# Altium PCB River Level Sensor Datalogger.PcbDoc
Units mm, origin at the board's own origin, x right, y up, seen from the top; angles counter-clockwise.
Board outline 74.09 x 59.44 mm, 2 copper layers (Top Layer, Bottom Layer); 26 components, 21 nets, 115 pads, 15 vias.
Unrouted connection lines stored in the file: 3.
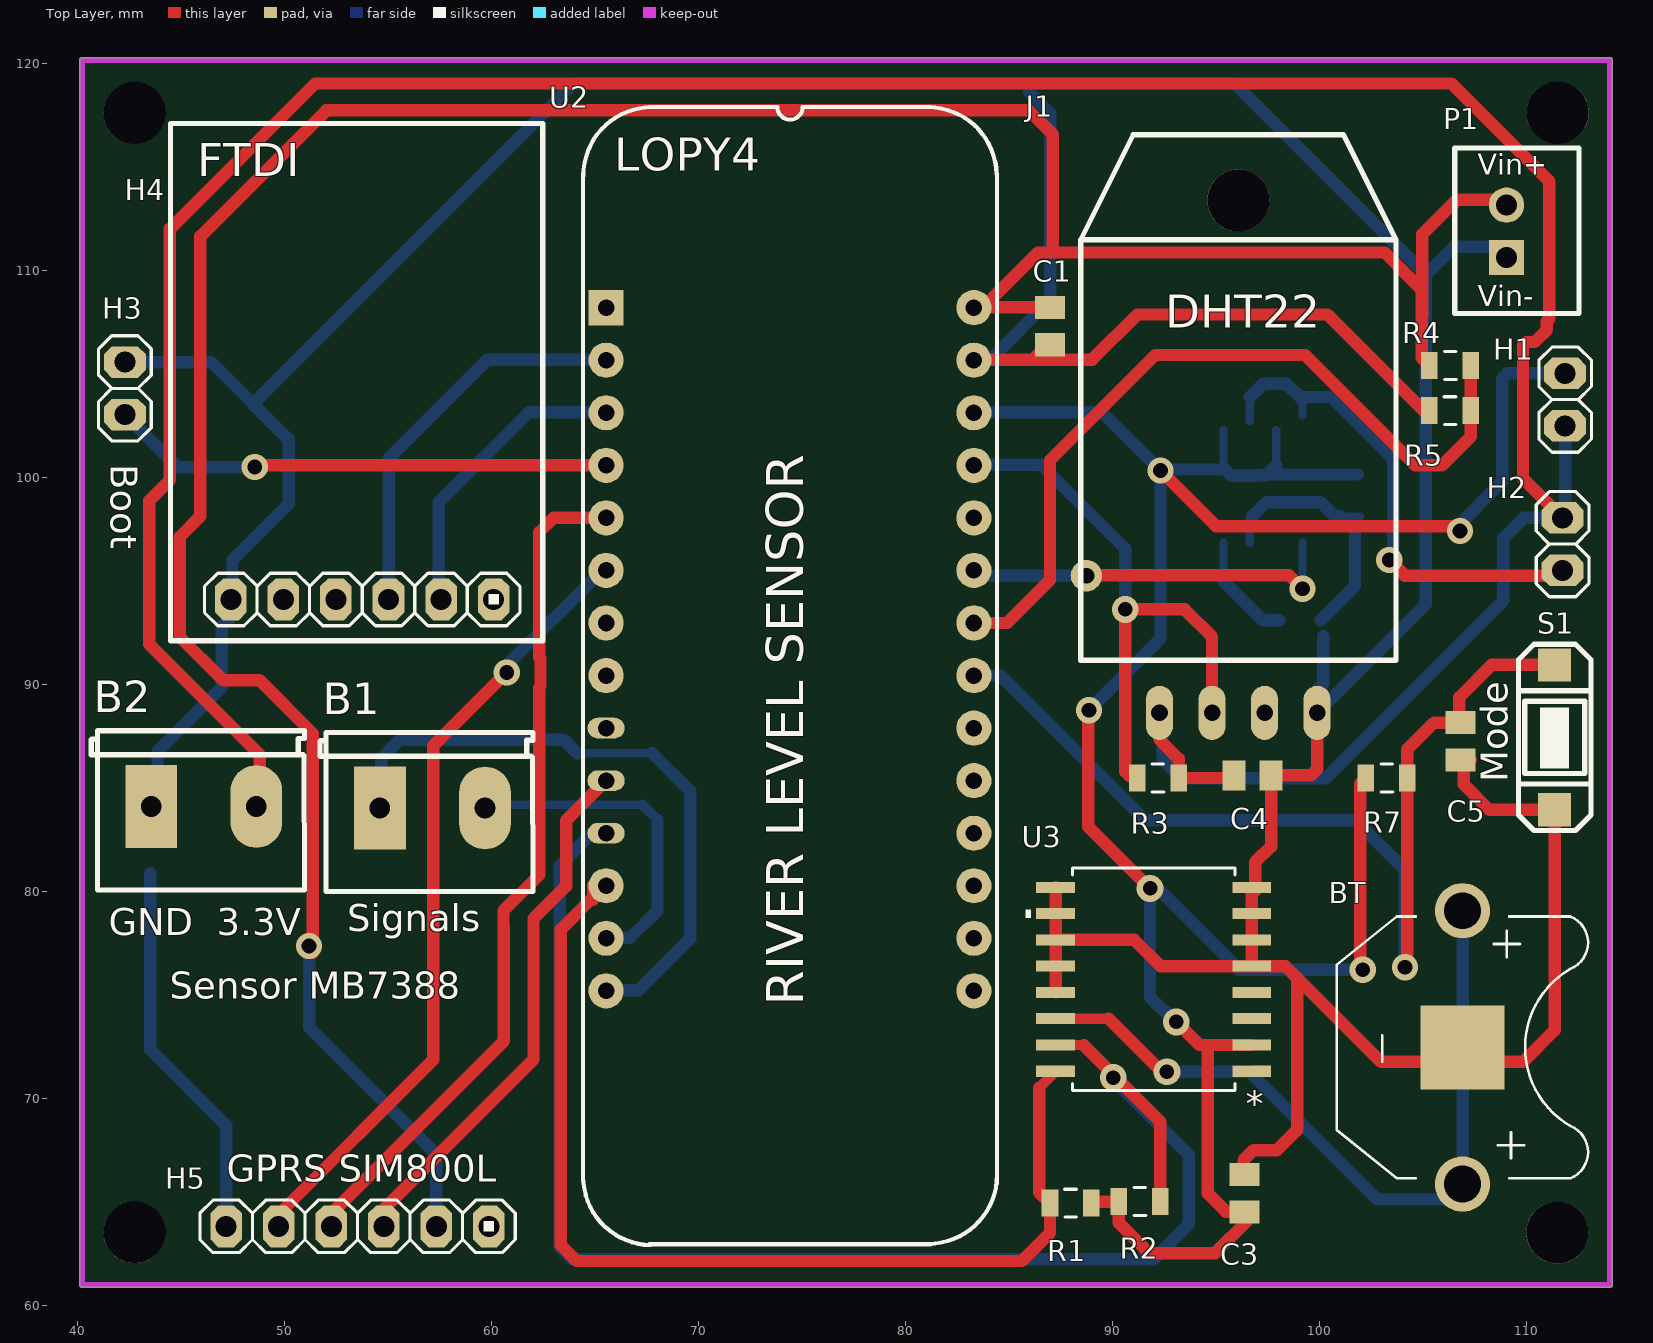
[diagram p0: Top Layer view]
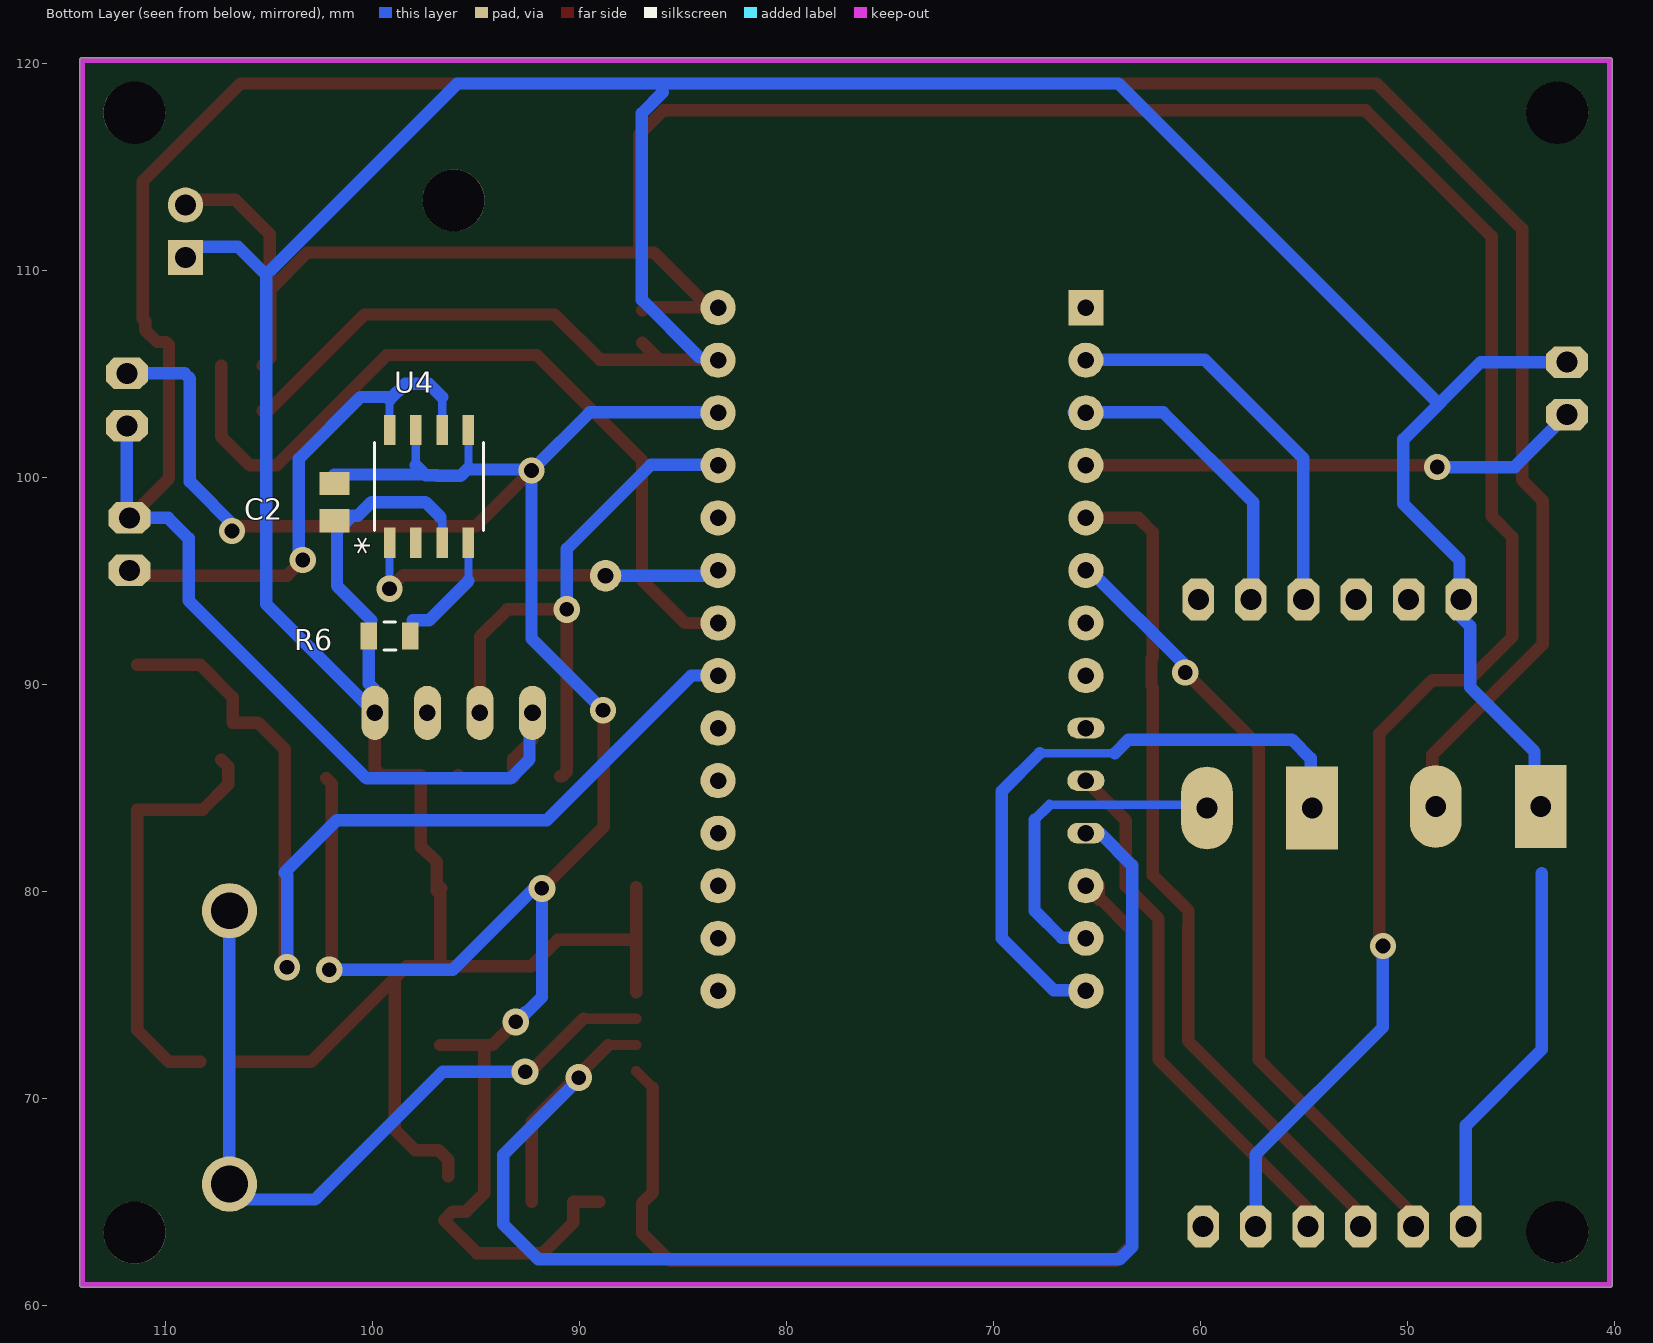
[diagram p1: Bottom Layer view, seen from below]

## Layer stack, top to bottom
Top Solder: solder mask 0.0102, Solder Resist, Dk 3.5
Top Layer: signal copper 0.0356
Dielectric 1: dielectric 0.32, FR-4, Dk 4.8
Bottom Layer: signal copper 0.0356
Bottom Solder: solder mask 0.0102, Solder Resist, Dk 3.5

## Board outline
40.208,60.858 cw(c40.208,60.985) 40.081,60.985 40.081,120.167 cw(c40.208,120.167) 40.208,120.295 114.046,120.295 cw(c114.046,120.167) 114.173,120.167 114.173,60.985 cw(c114.046,60.985) 114.046,60.858

## Design rules (kind name [scope] priority, off if disabled: settings)
Clearance [All] p1: gap=0.7
PolygonConnect [All] p1: connectstyle=Relief reliefconductorwidth=0.254 reliefentries=4 polygonreliefangle="90 Angle" airgapwidth=0.254
RoutingVias [All] p1: holewidth=0.711 width=1.27 viastyle="Through Hole" minholewidth=0.711 minwidth=1.27 maxholewidth=0.711 maxwidth=1.27
SolderMaskExpansion [All] p1: expansion=0.102
Width [All] p1: maxlimit=0.7 minlimit=0.4 preferedwidth=0.6 minimp=50.000000 maximp=50.000000 favimp=50.000000
30 further rules are at their usual default settings.

## Components (designator, comment, footprint, x,y, rotation, side; value= is the part's Value field where it differs from the comment)
B1 "Borne" BORNE2 57.1,84.05 r0 top
B2 "Borne" BORNE2 46.05,84.125 r0 top
BT "BK-5091" BAT_BK-5091 106.925,72.45 r270 top
C1 "08055C104KAT2A" CAP_X7R_0805_AVX 86.995,107.315 r90 top
C2 "08055C104KAT2A" CAP_X7R_0805_AVX 101.854,98.806 r90 bottom
C3 "08055C104KAT2A" CAP_X7R_0805_AVX 96.393,65.405 r270 top
C4 "08055C104KAT2A" CAP_X7R_0805_AVX 96.774,85.598 r180 top
C5 "08055C104KAT2A" CAP_X7R_0805_AVX 106.825,87.25 r90 top
H1 "Header" "Header 1X2" 111.887,105.029 r270 top
H2 "Header" "Header 1X2" 111.76,95.504 r90 top
H3 "Header" "Header 1X2" 42.275,105.575 r270 top
H4 "sparkfunFTDI" sparkfunFTDI 52.475,94.1 r0 top
H5 "Header 6" "Header 1X6" 52.25,63.8 r0 top
J1 "DHT22" DHT22 96.088,88.621 r0 top
P1 "Header 2" BORNERA25-2 109.05,110.625 r90 top
R1 "Res1" 0805 87.986,64.922 r180 top
R2 "Res2" 0805 91.313,64.999 r0 top
R3 "Res3" 0805 92.202,85.471 r0 top
R4 "Res4" 0805 106.324,105.41 r0 top
R5 "Res5" 0805 106.324,103.226 r180 top
R6 "" 0805 99.187,92.329 r180 bottom
R7 "Res1" 0805 103.251,85.471 r0 top
S1 "SW-PB" BUTTON-1-SMD 111.379,91.186 r0 top
U2 "LoPy4" LoPy 74.422,91.694 r270 top
U3 "ds3231s#" 21-0042B_16_MXM 91.999,75.743 r180 top
U4 "MIC2545A-2YM-TR" SOP-8_MCH 97.282,99.568 r90 bottom

## Footprints (in the part's own frame and the unit in brackets; to place one, negate y for a bottom-side part, rotate by r counter-clockwise, add the part's x,y. Pads: shape width x height; smd on the part's side, far side on the other; paste and mask are expansions set on the pad)
21-0042B_16_MXM [mil]
  rect 74x21 smd paste+0 mask+0: 1(-186.5,175) 2(-186.5,125) 3(-186.5,75) 4(-186.5,25) 5(-186.5,-25) 6(-186.5,-75) 7(-186.5,-125) 8(-186.5,-175) 9(186.5,-175) 10(186.5,-125) 11(186.5,-75) 12(186.5,-25) 13(186.5,25) 14(186.5,75) 15(186.5,125) 16(186.5,175)
  silkscreen extent -155,-212 244,212, body extent -209,-210 209,203, height 104
0805 [mm] "Chip Resistor, Empaque 0805"
  rect 0.8x1.3 smd: 1(-1,0) 2(1,0)
  silkscreen extent -0.27,-0.67 0.3,0.67, body extent -1,-0.63 1,0.62, height 0.78
BAT_BK-5091 [mm]
  round 2.67 hole 1.78: 1+(-6.605,0) 2+(6.605,0)
  rect 4.06x4.06 smd: NEG(0,0)
  silkscreen extent -6.33,-6.07 6.33,6.07, body extent -9.63,-6.99 9.37,5.59, height 3.22
BORNE2 [mm] "Terminal atornillable 2 salidas"
  rect 2.5x4 hole 1: 1(-2.501,-0.028)
  oval 2.5x4 hole 1: 2(2.579,-0.028)
  silkscreen extent -5.4,-4.06 4.9,3.62, body extent -5.51,-3.97 4.99,3.73, height 10
BORNERA25-2 [mm]
  rect 1.7x1.7 hole 1: 1(0,0)
  round 1.7 hole 1: 2(2.54,0)
  silkscreen extent -2.7,-3.5 5.3,2.5, body extent -1.29,-3.22 3.79,2.62, height 10.1
BUTTON-1-SMD [mm]
  rect 1.6x1.6 smd: 1(0,-0.25) 2(0,-7.25)
  silkscreen extent -1.75,-8.25 1.75,0.75, body extent -1.8,-7.75 1.8,0.25, height 2.5
CAP_X7R_0805_AVX [mil]
  rect 44x57 smd paste+0 mask+0: 1(-35.5,0) 2(35.5,0)
  body extent -44,-29 44,29, height 37
DHT22 [mm]
  oval 1.308x2.616 hole 0.8: DATA(-1.27,0) GND(3.81,0) NC(1.27,0) VDD(-3.81,0)
  round 3 hole 3 unplated: ""(0,24.765)
  silkscreen extent -7.62,2.54 7.62,27.94, body extent -7.73,-0.57 7.37,29.78, height 7.73
"Header 1X2" [mil] "Conector Header 1 linea 2 terminales"
  oct 60x80 hole 40: 1(0,0) 2(100,0)
  silkscreen extent -50,-50 150,50, body extent -50,-49 150,49, height 341
"Header 1X6" [mil] "Conector Header 1 linea 6 terminales"
  oct 60x80 hole 40: 1(-200,0) 2(-100,0) 3(0,0) 4(100,0) 5(200,0) 6(300,0)
  silkscreen extent -250,-50 350,50, body extent -250,-48 350,50, height 344
LoPy [mm] "DIP, Plastic; 28 Leads; Row Spacing 15.24 mm; Pitch 2.54 mm"
  rect 1.7x1.7 hole 0.8: 1(-16.51,-8.89)
  round 1.7 hole 0.8: 2(-13.97,-8.89) 3(-11.43,-8.89) 4(-8.89,-8.89) 5(-6.35,-8.89) 6(-3.81,-8.89) 7(-1.27,-8.89) 8(1.27,-8.89) 12(11.43,-8.89) 13(13.97,-8.89) 14(16.51,-8.89) 15(16.51,8.89) 16(13.97,8.89) 17(11.43,8.89) 18(8.89,8.89) 19(6.35,8.89) 20(3.81,8.89) 21(1.27,8.89) 22(-1.27,8.89) 23(-3.81,8.89) 24(-6.35,8.89) 25(-8.89,8.89) 26(-11.43,8.89) 27(-13.97,8.89) 28(-16.51,8.89)
  oval 1x1.8 hole 0.8: 9(3.81,-8.89) 10(6.35,-8.89) 11(8.89,-8.89)
  silkscreen extent -26.21,-10 28.8,10, body extent -26.61,-10.03 28.64,10.29, height 6.2
SOP-8_MCH [mil]
  rect 57.5x22 smd paste+0 mask+0: 1(-107.25,75) 2(-107.25,25) 3(-107.25,-25) 4(-107.25,-75) 5(107.25,-75) 6(107.25,-25) 7(107.25,25) 8(107.25,75)
  silkscreen extent -84,-104 84,104, body extent -117,-99 127,99, height 69
sparkfunFTDI [mil] "Conector Header 1 linea 6 terminales"
  oct 60x80 hole 40: 1(-200,0) 2(-100,0) 3(0,0) 4(100,0) 5(200,0) 6(300,0)
  silkscreen extent -315,-79 394,906, body extent -310,39 394,1001, height 306

## Part data
B1 B2: library part Borne2, "Terminal Atornillable 2 salidas"
BT: "Battery Retainer Coin, 11.6mm 1 Cell PC Pin"
C1 C2 C3 C4 C5 U3 U4: "No Description Available"
H1 H2 H3: library part "Header 2", "Header 2 pin"
H4 H5: "Header, 6-Pin"
J1: "Capacitive-type humidity and temperature module/sensor"
P1: "Header, 2-Pin"
R1 R7: "Resistor"
R2 R3 R4 R5 R6: library part Res1, "Resistor"
S1: "Switch"
U2: library part LoPy, "LoPy, Wifi and Bluetooth Microcontroller, 4M RAM, 4 MHz, 28-Pin, 3.0 to 5.5V Supply Range, Commercial Temperature"

## Free pads (board coordinates)
  round 3 hole 3: 2(42.75,63.525) 2(42.75,117.625) 2(111.506,63.5) 2(111.525,117.625)
  round 1.524 hole 0.762: 3(88.75,95.25)

## Via types
v1: diameter 1.27, hole 0.711, Top Layer to Bottom Layer, 10 vias
v2: diameter 1.3, hole 0.7, Top Layer to Bottom Layer, 5 vias

## Nets (pads, with @x,y where several pads share a name; then routed paths per layer and width w, separated by ;. In a path a pad name is that pad's centre, name@x,y a point inside that pad or via, vN(x,y) a via of type N, cw(c..) or ccw(c..) an arc to the next point about the centre after c; other vN are vias at no path point)
3.3V: C2.2 C3.2 H1.1 R1.1 R2.1 R7.1 U2.26 U3.2 U4.5 U4.7 | length 125.5
  Top Layer w0.6: v1@88.833,88.75 88.833,83.125 v2(91.821,80.137) ; R1.1@89.062,64.999 R2.1 90.313,63.967 91.77,62.509 94.971,62.509 96.558,64.097 96.139,64.516 95.487,64.516 94.615,65.388 94.615,72.568 ; v1(92.329,100.33) 95.012,97.647 106.569,97.647 v1(106.807,97.409) ; v2(93.091,73.685) 94.209,72.568 94.615,72.568 ; U3.2 94.615,72.568 ; v1(102.108,76.2) 102.14,76.2 101.981,76.359 101.981,85.201 R7.1
  Bottom Layer w0.4: 95.368,100.466 U4.5@95.368,102.292 ; 97.917,100.584 U4.7
  Bottom Layer w0.6: U2.26@83.896,103.149 89.51,103.149 92.278,100.381 95.453,100.381 ; v1@88.875,88.55 v1(88.875,88.75) 92.329,92.204 v1(92.329,100.33) ; v2@91.821,80.01 91.821,74.879 92.634,74.066 92.634,74.143 v2(93.091,73.685) ; v2(91.821,80.137) 92.202,80.137 96.139,76.2 v1@101.854,76.2 ; 95.368,100.466 95.453,100.381 ; 97.917,100.584 97.472,100.139 ; C2.2@101.854,100.139 97.472,100.139 ; v1@106.553,97.409 106.553,97.506 108.839,99.792 108.839,104.775 109.093,105.029 H1.1 ; 95.453,100.381 95.758,100.076 96.887,100.076 96.917,100.106 97.439,100.106 97.472,100.139
"3.3V OUT MIC2545": H2.1 U4.6 U4.8 | length 24.5
  Top Layer w0.6: v1(103.378,96.012) 104.14,95.25 111.506,95.25 H2.1
  Bottom Layer w0.4: U4.6@96.647,102.743 96.647,103.886 ; U4.8@99.187,102.997 99.187,103.759
  Bottom Layer w0.6: 96.647,103.886 97.282,104.521 98.425,104.521 99.187,103.759 ; 99.187,103.886 100.584,103.886 103.578,100.892 103.578,95.958 v1@103.505,95.885
"3.3V SENSORS": B2.1 C4.2 H1.2 H2.2 J1.VDD R3.2 | length 160
  Top Layer w0.6: 48.8,83.775 48.8,86.582 43.454,91.928 43.454,98.879 44.45,99.875 44.45,112.014 51.476,119.04 106.385,119.04 111.125,114.3 111.125,107.675 111.003,107.553 111.003,107.132 110.417,106.546 109.996,106.546 109.85,106.4 109.85,99.954 H2.2 ; J1.VDD 92.278,87.322 93.202,86.398 R3.2 95.745,85.471 C4.2
  Bottom Layer w0.6: J1.VDD 92.425,88.474 92.425,86.375 93.35,85.45 100.3,85.45 108.9,94.05 108.9,97.05 109.894,98.044 H2.2 111.887,98.171 H1.2
BATTERY_LEVEL: R4.2 R5.1 U2.22 | length 39
  Top Layer w0.6: U2.22 84.914,92.964 86.988,95.038 86.988,100.831 92.075,105.918 99.314,105.918 104.648,100.584 105.927,100.584 107.324,101.981 R5.1 R4.2
DHT22_SIGNAL: J1.DATA R3.1 U2.25 | length 28.1
  Top Layer w0.6: R3.1@90.932,85.547 90.856,85.547 90.624,85.779 v2(90.624,93.624) 93.497,93.624 94.818,92.304 J1.DATA
  Bottom Layer w0.6: U2.25@83.769,100.609 86.563,100.609 90.624,96.548 v2(90.624,93.624)
GND: B2.2 BT.NEG C1.1 C2.1 C3.1 C4.1 C5.1 H3.1 H4.1 H5.1 J1.GND P1.1 R5.2 R6.1 S1.2 U2.27 U3.5 U3.6 U3.7 U3.8 U3.9 U3.10 U3.11 U3.12 U3.13 U4.3 | length 271.9
  Top Layer w0.6: U2.27@83.769,105.689 86.154,105.689 ; C1.1@86.97,106.505 86.154,105.689 ; U3.13 U3.12 U3.11 ; U3.9 U3.10 U3.11 ; C3.1@96.342,66.218 96.342,67.005 96.825,67.488 97.955,67.488 98.933,68.466 98.933,75.811 ; U3.8@96.685,80.137 96.736,80.086 U3.7 U3.6 U3.5 ; U3.8@96.901,80.01 96.901,81.407 97.663,82.169 97.676,82.156 C4.1 99.593,85.598 99.898,85.903 J1.GND ; R5.2 105.045,103.226 100.395,107.875 91.213,107.875 89.027,105.689 86.154,105.689 ; BT.NEG@106.934,71.755 102.989,71.755 98.933,75.811 ; C5.1@107.315,86.347 106.975,86.007 106.975,85.176 108.215,83.936 S1.2 111.379,73.279 109.855,71.755 BT.NEG@108.331,71.755 ; U3.11 91.059,77.648 92.329,76.378 U3.5 ; U3.5 96.739,76.375 98.37,76.375 98.933,75.811
  Bottom Layer w0.4: U4.3 96.647,97.998 ; 101.028,98.108 C2.1@101.981,98.108
  Bottom Layer w0.6: H3.1 46.45,105.575 50.185,101.84 50.185,98.724 47.475,96.014 47.475,93.325 46.95,92.8 46.95,89.85 43.85,86.75 43.85,85.675 ; 43.5,80.875 43.5,72.35 47.17,68.68 H5.1 ; 48.475,103.55 63.965,119.04 95.91,119.04 104.948,110.002 ; 84.226,105.816 86.995,108.585 86.995,117.602 85.979,118.618 ; 96.734,98.084 97.455,98.806 100.059,98.806 100.716,98.149 100.987,98.149 101.727,97.409 101.727,94.758 100.06,93.091 ; R6.1 100.187,90.027 99.898,89.738 J1.GND 105.156,93.878 105.156,109.794 106.512,111.15 P1.1@109.075,111.15
"MODE BUTTOM": C5.2 R7.2 S1.1 U2.21 | length 49.6
  Top Layer w0.6: v1@104.251,76.327 R7.2 104.251,86.852 105.55,88.151 106.775,88.151 106.775,89.376 108.335,90.936 S1.1
  Bottom Layer w0.6: U2.21 84.601,90.424 91.586,83.439 101.727,83.439 104.267,80.899 104.14,80.772 v1(104.14,76.327)
NetBT_1+: BT.1+ BT.2+ U3.14 | length 35.7
  Top Layer w0.5: U3.14 89.814,73.838
  Top Layer w0.6: 89.814,73.838 v2@92.418,71.234
  Bottom Layer w0.6: v2(92.634,71.272) 96.622,71.272 102.794,65.1 BT.2+@106.299,65.1 ; BT.2+@106.934,65.15 BT.1+@106.934,78.36
NetR6_2: R6.2 U4.4 | length 5.3
  Bottom Layer w0.4: 95.377,94.996 U4.4
  Bottom Layer w0.6: 95.377,94.996 97.282,93.091 98.06,93.091
P2: H3.2 U2.4 | length 24.3
  Top Layer w0.6: v1@48.55,100.6 48.566,100.584 U2.4
  Bottom Layer w0.6: H3.2 44.81,100.5 v1(48.55,100.5)
P21: pad.3 U2.23 U4.1 | length 18.8
  Top Layer w0.6: U2.23 U2.23@83.542,95.274 ; pad.3 88.774,95.274 98.528,95.274 v1(99.187,94.615)
  Bottom Layer w0.4: v1(99.187,94.615) U4.1
  Bottom Layer w0.6: U2.23 83.566,95.25 pad.3
PULSE_HRXL-MAXSONAR: B1.2 U2.13 | length 14.8
  Bottom Layer w0.4: B1.2@60.303,84.179 67.288,84.179
  Bottom Layer w0.5: 67.288,84.179 68.016,83.451
  Bottom Layer w0.6: U2.13@66.116,77.749 66.7,77.749 68.016,79.065 68.016,83.451
RESETGPRS: H5.4 U2.10 | length 26
  Top Layer w0.6: H5.4 54.79,64.64 62.025,71.875 62.025,78.672 63.6,80.247 63.6,83.412 U2.10
RXD_CONVERTER: H4.5 U2.3 | length 14.9
  Bottom Layer w0.6: H4.5@57.45,94.325 57.45,98.801 61.798,103.149 U2.3@66.116,103.149
RXD_GPRS: H5.3 U2.5 | length 41.7
  Top Layer w0.6: H5.3 52.25,64.425 60.594,72.769 60.594,78.286 60.575,78.305 60.575,79.06 62.3,80.785 62.3,89.838 62.36,89.898 62.36,91.252 62.3,91.312 62.3,97.35 62.994,98.044 U2.5
  Bottom Layer w0.6: U2.5@65.583,98.069 U2.5@65.989,98.069
SCL_RTC: R1.2 U2.12 U3.16 | length 52.1
  Top Layer w0.5: 86.462,70.498 U3.16
  Top Layer w0.6: U2.12@65.989,80.224 65.989,80.289 64.9,80.289 64.9,79.574 64.766,79.574 63.35,78.158 63.35,62.888 64.11,62.128 85.623,62.128 86.986,63.491 R1.2 86.462,65.446 86.462,70.498
SDA_RTC: R2.2 U2.11 U3.15 | length 72
  Top Layer w0.5: U3.15@87.265,72.565 88.616,72.565
  Top Layer w0.6: 88.616,72.565 92.313,68.867 R2.2
  Bottom Layer w0.6: U2.11@65.989,82.829 64.879,82.829 63.3,81.25 63.3,62.811 63.906,62.205 91.999,62.205 93.701,63.906 93.701,67.259 v2@90.132,70.828
  other v2: 90.043,70.993
TRIGGER_PULSE_HRXL-MAXSONAR: B1.1 U2.14 | length 30.4
  Bottom Layer w0.4: 64.135,86.67 67.762,86.67
  Bottom Layer w0.6: B1.1@54.674,83.947 54.674,86.424 55.575,87.325 63.48,87.325 64.135,86.67 ; U2.14@66.116,75.209 67.081,75.209 69.596,77.724 69.596,84.836 67.762,86.67
TXD_CONVERTER: H4.4 U2.2 | length 20.3
  Bottom Layer w0.6: H4.4@55.025,93.6 55.025,100.923 59.792,105.689 U2.2@65.989,105.689
TXD_GPRS: H5.2 U2.6 | length 38.4
  Top Layer w0.6: H5.2 49.784,63.874 49.784,64.459 57.175,71.85 57.175,87.025 v1(60.725,90.575)
  Bottom Layer w0.6: v1(60.725,90.575) 60.725,90.9 65.329,95.504 U2.6 ; U2.6@65.989,95.464 U2.6@65.989,95.529
VCC: C1.2 H5.5 P1.2 R4.1 U2.28 | length 143.7
  Top Layer w0.6: v1@51.356,77.019 51.356,87.619 48.775,90.2 47.02,90.2 44.925,92.295 44.925,97.125 45.925,98.125 45.925,111.651 52.015,117.74 85.96,117.74 87.125,116.575 87.125,110.871 ; C1.2@86.97,108.074 86.814,108.229 83.769,108.229 86.411,110.871 87.125,110.871 ; 104.975,107.823 104.975,111.747 106.653,113.425 108.81,113.425 P1.2@109.075,113.69 ; R4.1 104.95,105.784 104.95,109.086 103.165,110.871 87.125,110.871
  Bottom Layer w0.6: v1(51.175,77.35) 51.175,73.425 57.33,67.27 H5.5
pads on no net: H4.2 H4.3 H4.6 H5.6 J1. J1.NC U2.1 U2.7 U2.8 U2.9 U2.15 U2.16 U2.17 U2.18 U2.19 U2.20 U2.24 U3.1 U3.3 U3.4 U4.2

## Keep-outs
Keep-Out Layer:
  lines w0.254: 40.208,60.985 114.046,60.985 114.046,120.167 40.208,120.167 40.208,60.985

## Silkscreen, mask and mechanical layers (free items; w line width, h text height)
Top Overlay:
  text "LOPY4" at 65.934,114.831 h1.6
  text "Vin+" at 107.65,114.625 h1
  text "FTDI" at 45.773,114.556 h1.6
  text "Vin-" at 107.65,108.275 h1
  text "DHT22" at 92.549,107.225 h1.6
  text "Boot" at 41.6,100.625 h1.3 r270
  text "Mode" at 109.1,85.275 h1.3 r90
  text "Signals" at 53.025,78.075 h1.3
  text "GND" at 41.5,77.875 h1.3
  text "3.3V" at 46.725,77.875 h1.3
  text "Sensor MB7388" at 44.45,74.8 h1.3
  text "RIVER LEVEL SENSOR" at 75.05,74.475 h1.8 r90
  text "GPRS SIM800L" at 47.2,65.95 h1.3

## Text inside footprints (layer, text, board x,y; h text height)
U3: Top Overlay "*" at 97.307,70.891 h1.27 r180; Mechanical 13 "*" at 95.733,71.844 h1.27 r180
U4: Mechanical 13 "*" at 98.438,97.638 h1.27 r270; Bottom Overlay "*" at 99.619,96.272 h1.27 r270